# Altium PCB FCB_REV3.PcbDoc (part 1 of 2)
Units mil, origin at the board's own origin, x right, y up, seen from the top; angles counter-clockwise.
Board outline 3750 x 3250 mil, 4 copper layers (Top Layer, Layer 1, Layer 2, Bottom Layer), stack 23.756 mil thick; 113 components, 86 nets, 742 pads, 129 vias.
Unrouted connection lines stored in the file: 77.
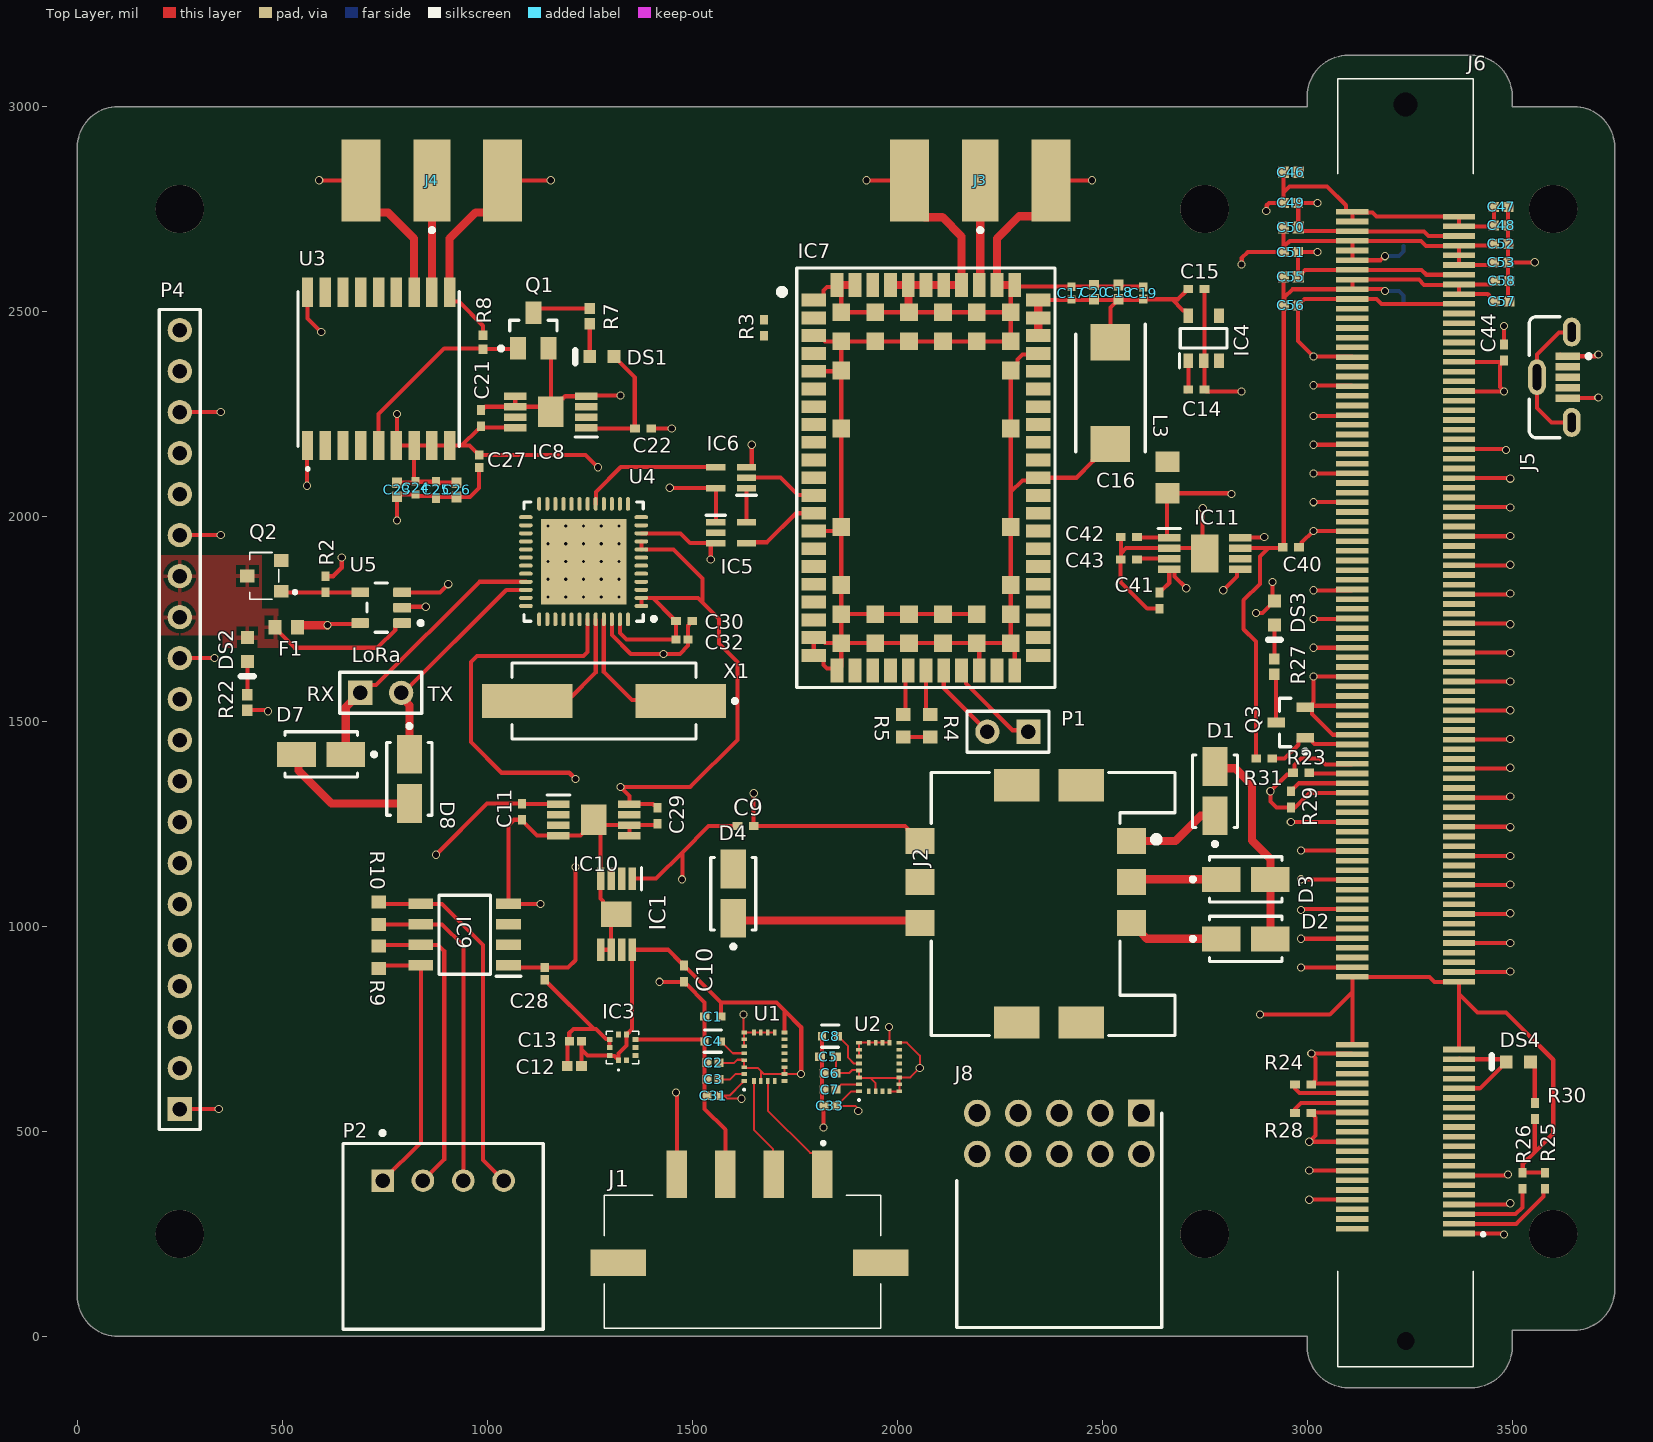
[diagram p0: Top Layer view]
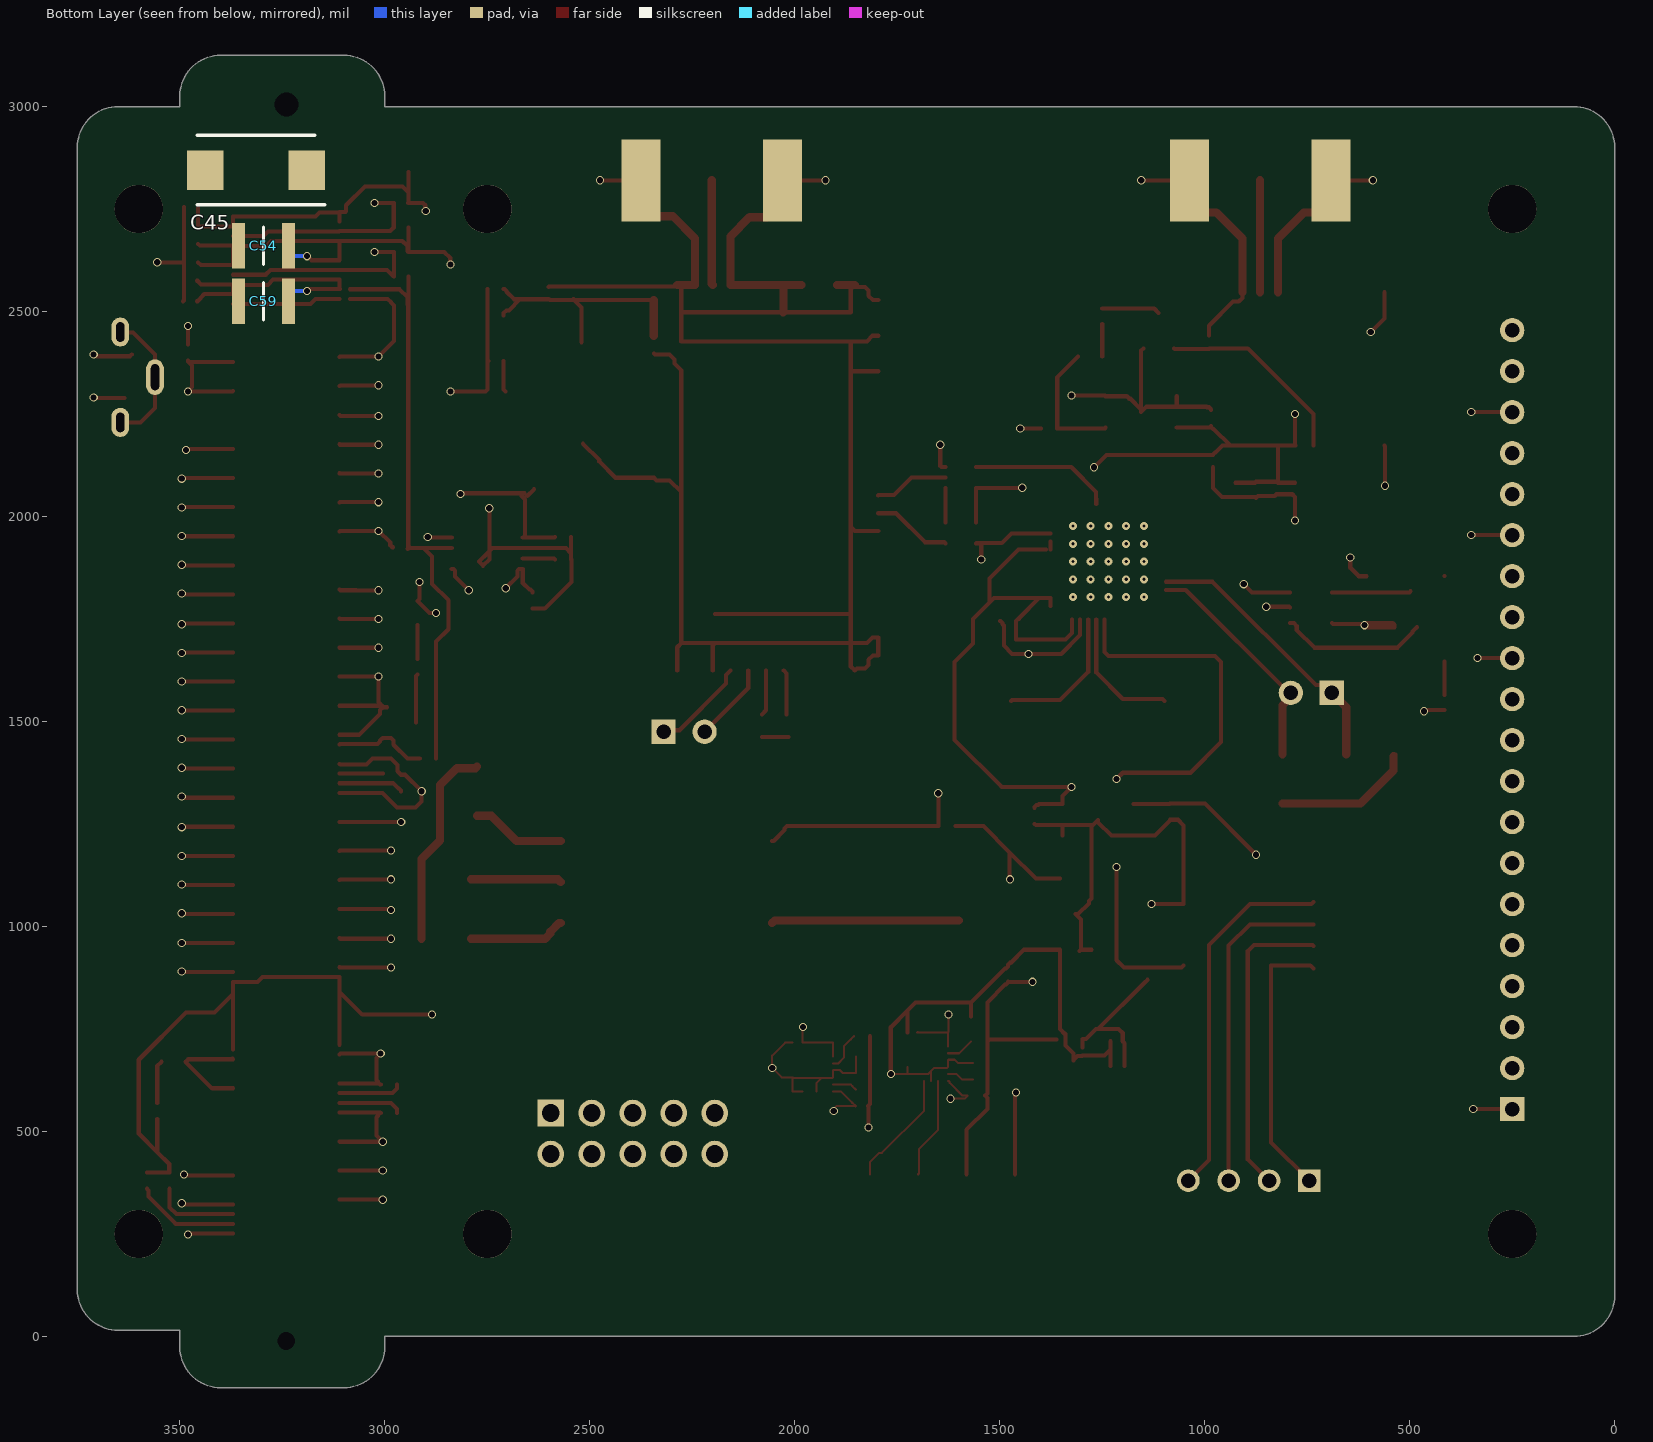
[diagram p1: Bottom Layer view, seen from below]
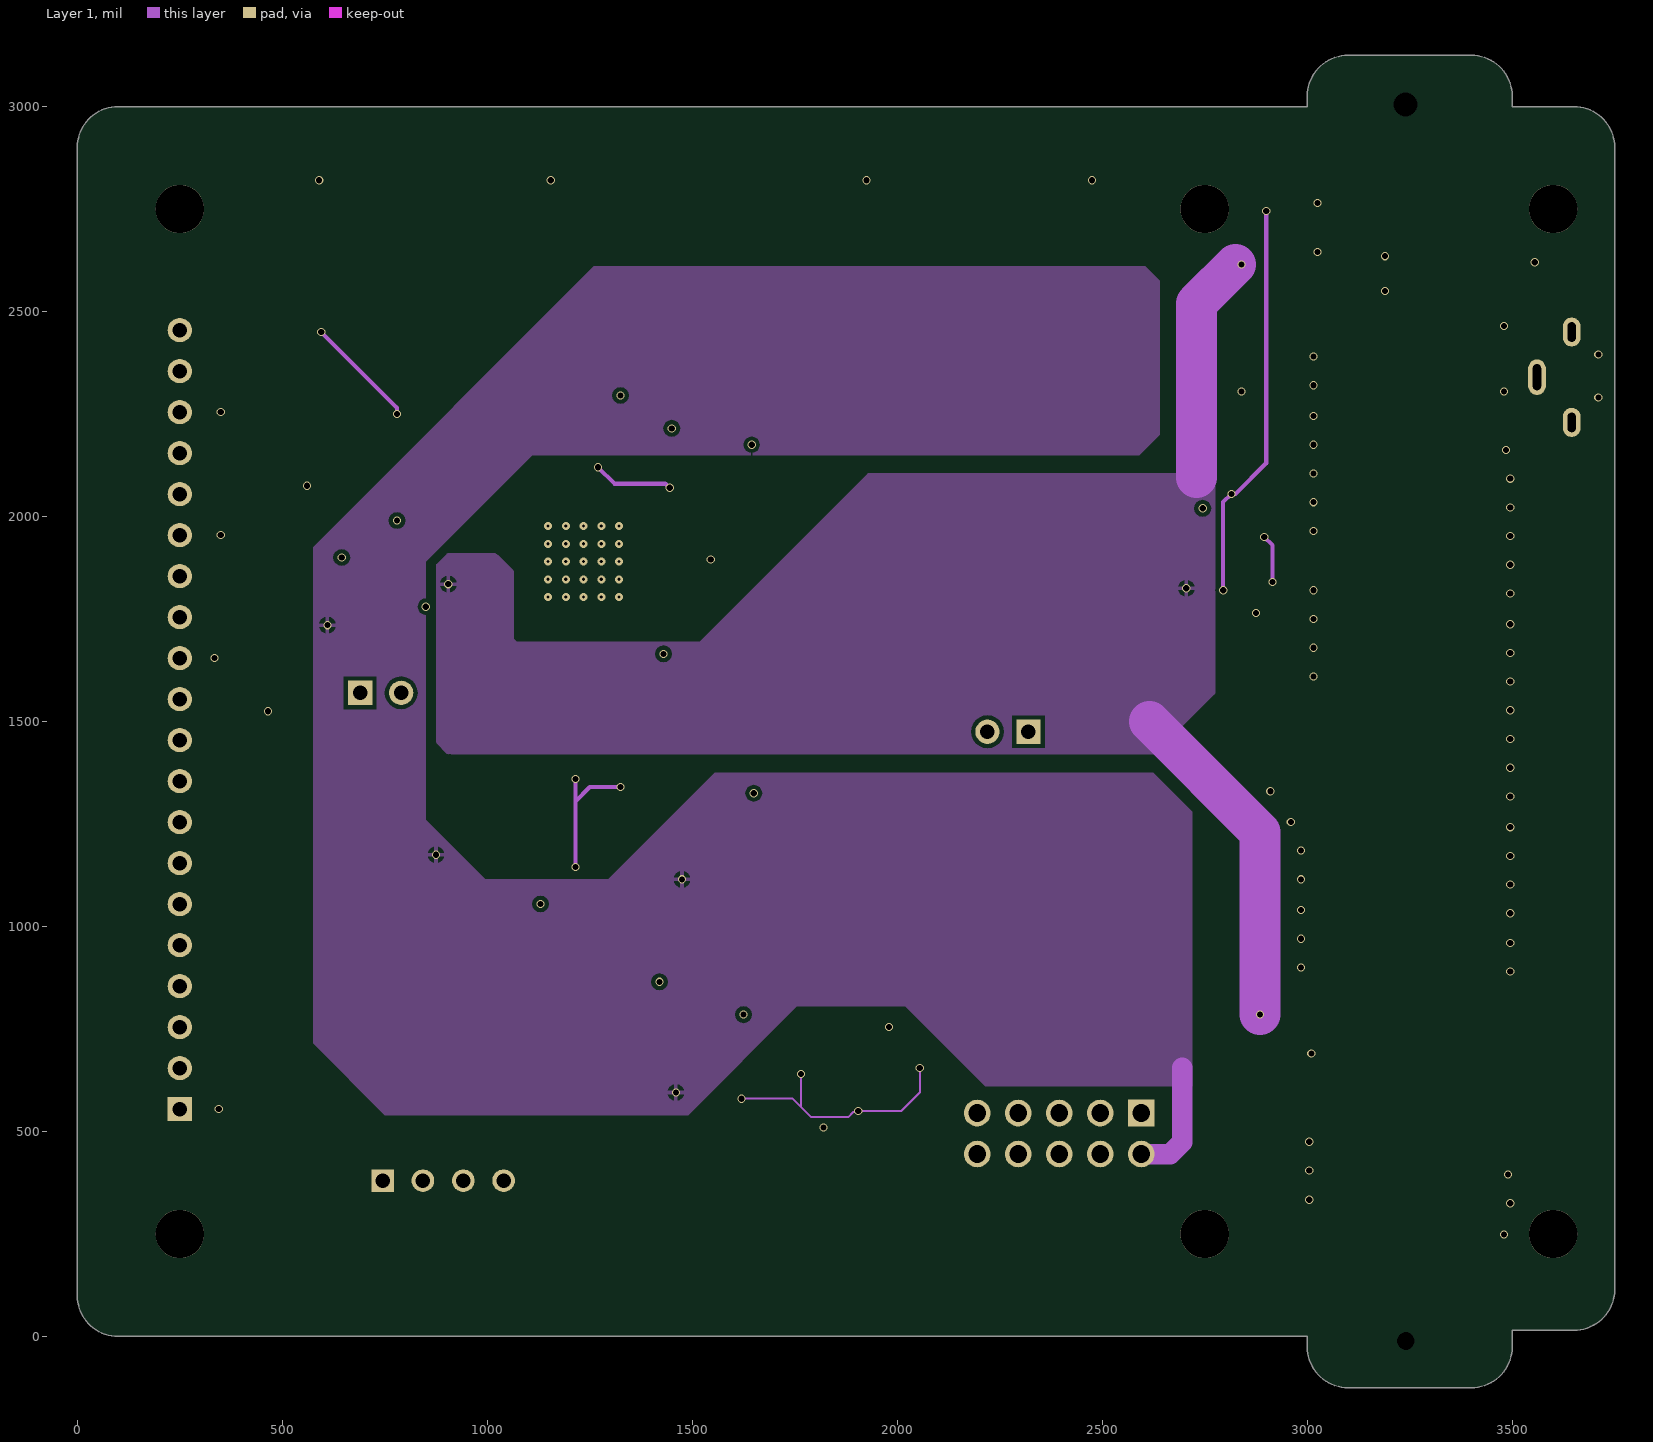
[diagram p2: Layer 1]
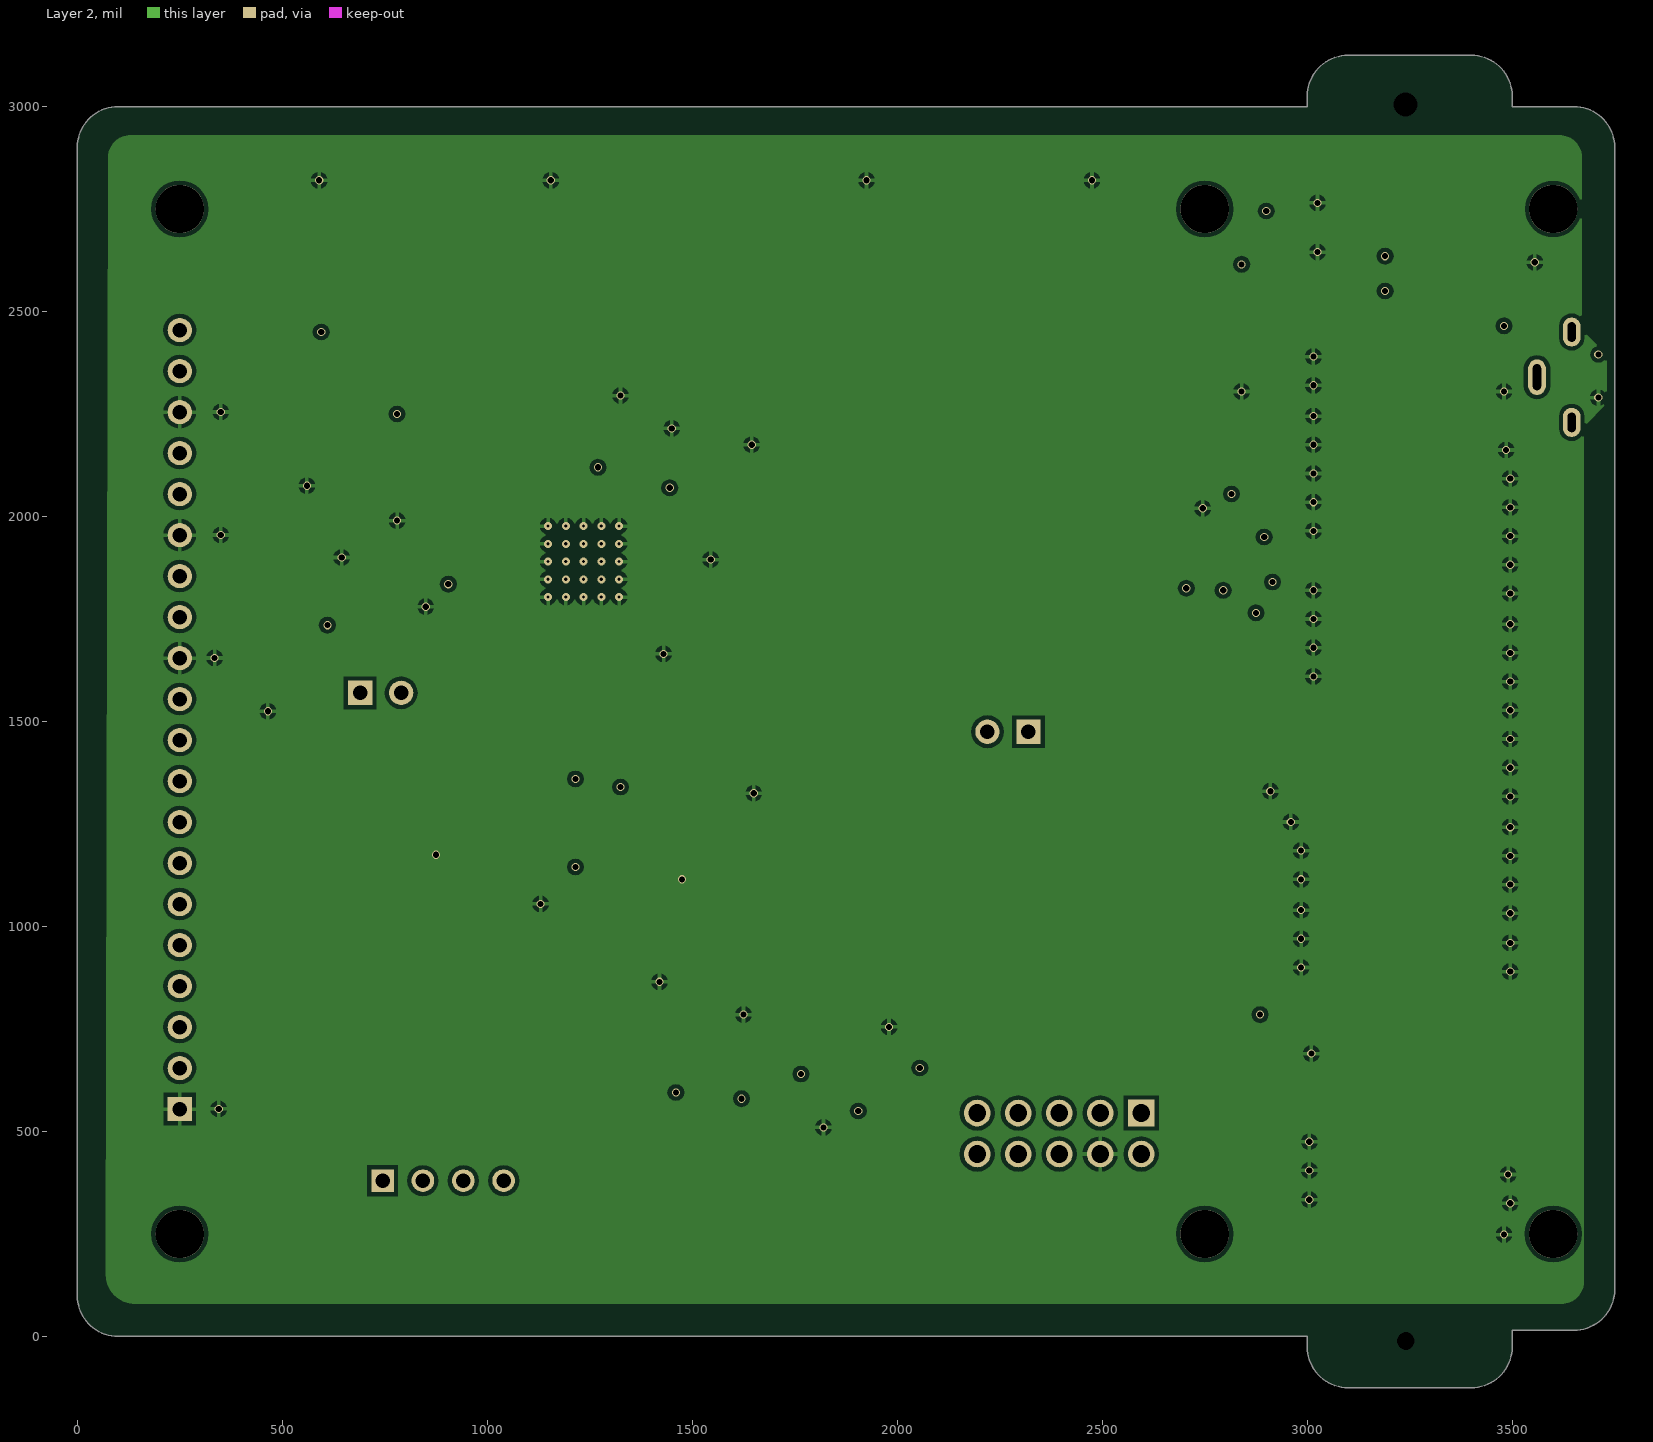
[diagram p3: Layer 2]

## Layer stack, top to bottom
Top Solder: solder mask 0.4, Solder Resist, Dk 3.5
Top Layer: signal copper 1.4
Dielectric 2: prepreg 2.8, PP-006, Dk 4.1
Layer 1: signal copper 1.378
Dielectric 1: dielectric 12.6, FR-4, Dk 4.8
Layer 2: signal copper 1.378
Dielectric 3: prepreg 2.8, PP-006, Dk 4.1
Bottom Layer: signal copper 1.4
Bottom Solder: solder mask 0.4, Solder Resist, Dk 3.5

## Board outline
3000,0 3000,-25 ccw(c3100,-25) 3100,-125 3400,-125 ccw(c3400,-25) 3500,-25 3500,15 3650,15 ccw(c3650,115) 3750,115 3750,2900 ccw(c3650,2900) 3650,3000 3500,3000 3500,3025 ccw(c3400,3025) 3400,3125 3100,3125 ccw(c3100,3025) 3000,3025 3000,3000 100,3000 ccw(c100,2900) 0,2900 0,100 ccw(c100,100) 100,0

## Design rules (kind name [scope] priority, off if disabled: settings)
Clearance [All] p1: gap=10 ignorepadtopadclearanceinfootprint=TRUE except(0: Arc-Hole Track-Hole SMDPad-Hole THPad-Hole Fill-Hole Poly-Hole Region-Hole Text-Hole; 4: Arc-Arc Arc-Track Arc-SMDPad Track-Track Track-SMDPad; 5: SMDPad-SMDPad; 8: SMDPad-Fill SMDPad-Poly SMDPad-Region; 22: Via-Hole)
HoleSize [All] p1: absolutevalues=TRUE maxlimit=100 minlimit=8 maxpercent=80.000 minpercent=20.000
PolygonConnect [All] p1: connectstyle=Relief reliefconductorwidth=10 reliefentries=4 polygonreliefangle="90 Angle" airgapwidth=10
RoutingVias [All] p1: holewidth=15 width=20 viastyle="Through Hole" minholewidth=15 minwidth=20 maxholewidth=28 maxwidth=50
SolderMaskExpansion [All] p1: expansion=4 istentingtop=FALSE
Width [All] p1: maxlimit=100 minlimit=5 preferedwidth=10
29 further rules are at their usual default settings.

## Classes and differential pairs
component class PT_Connections: C9 C10 IC1 J1
component class U_Power: C40 C41 C42 C43 C44 C45 C46 C47 C48 C49 C50 C51 C52 C53 C54 C55 C56 C57 C58 C59 DS2 F1 IC11 J5 L3 Q2 R2 R22 U5
component class U_MAX14830ETM+: C11 C29 C30 C32 D7 D8 IC10 LoRa U4 X1
component class U_MAX3488AEGSA+: C28 IC9 P2 R9 R10
component class U_GPS_MAX-M8C-0-10: C21 C22 C23 C24 C25 C26 C27 DS1 IC8 J4 Q1 R7 R8 U3
component class U_Cell_SARA-G350-02S: C14 C15 C16 C17 C18 C19 C20 D1 D2 D3 D4 IC4 IC5 IC6 IC7 J2 J3 P1 R3 R4 R5
component class U_Barometer: C12 C13 IC3
component class U_Accelerometers: C1 C2 C3 C4 C5 C6 C7 C8 C31 C33 U1 U2
component class Top: DS3 DS4 J6 J8 P4 Q3 R23 R24 R25 R26 R27 R28 R29 R30 R31

## Components (designator, comment, footprint, x,y, rotation, side; value= is the part's Value field where it differs from the comment)
C1 "CL05A106MP8NUB8" 0402 1550,780 r0 top value=10uF
C2 "C0402C104Z4VAC7867" CAPC1005X60X30LL05T10 1550.75,667.32 r0 top
C3 "C0402C104Z4VAC7867" CAPC1005X60X30LL05T10 1550.83,627.32 r0 top
C4 "AC0402KRX7R8BB103" FP-AC0402-0_5-MFG 1550,720 r180 top value="10 nF"
C5 "CL05A106MP8NUB8" 0402 1831.14,682.32 r0 top value=10uF
C6 "C0402C104Z4VAC7867" CAPC1005X60X30LL05T10 1835.87,642.32 r0 top
C7 "C0402C104Z4VAC7867" CAPC1005X60X30LL05T10 1835.83,602.32 r0 top
C8 "AC0402KRX7R8BB103" FP-AC0402-0_5-MFG 1836.14,732.32 r180 top value="10 nF"
C9 "CL05A106MP8NUB8" 0402 1630,1245 r180 top value=10uF
C10 "CL05A106MP8NUB8" 0402 1480,885 r90 top value=10uF
C11 "CL05A106MP8NUB8" 0402 1085,1280 r90 top value=10uF
C12 "GRM022R60J103KE19L" CAPC1005X55X25NL05T10 1212.68,660 r0 top
C13 "C0402C104Z4VAC7867" CAPC1005X60X30LL05T10 1215,720 r0 top
C14 "298D105X0010K2T" 0402 2729.69,2310 r180 top value=1uF
C15 "298D105X0010K2T" 0402 2729.69,2555 r180 top value=1uF
C16 "6TPC330MA" CAPPM7343X200N 2520,2300.98 r270 top
C17 "C0402C150J4GACTU" CAPC0402(1005)60_L 2425,2545 r270 top value=15pF
C18 "GRM022R60J103KE19L" CAPC1005X55X25NL05T10 2540,2547.32 r270 top
C19 "C0402C104Z4VAC7867" CAPC1005X60X30LL05T10 2600,2544.96 r270 top
C20 "C0402C560K5RACTU" CAPC1005X55N 2480,2547.32 r270 top
C21 "CL05A106MP8NUB8" 0402 985,2240 r270 top value=10uF
C22 "CL05A106MP8NUB8" 0402 1380,2215 r180 top value=10uF
C23 "C0402C560K5RACTU" CAPC1005X55N 780,2065 r270 top value=56pF
C24 "C0402C150J4GACTU" CAPC0402(1005)60_L 825,2070 r270 top value=15pF
C25 "CL05A106MP8NUB8" 0402 875,2065 r90 top value=10uF
C26 "GRM022R60J103KE19L" CAPC1005X55X25NL05T10 925,2065 r90 top value=10nF
C27 "C0402C104Z4VACTU" CAPC1005X55X30LL05T10 980,2135 r90 top value=100nF
C28 "C0402C104Z4VAC7867" CAPC1005X60X30LL05T10 1140,885.04 r90 top
C29 "CL05A106MP8NUB8" 0402 1415,1270 r90 top value=10uF
C30 "CL05A106MP8NUB8" 0402 1480,1745 r180 top value=10uF
C31 "C0402C104Z4VACTU" CAPC1005X55X30LL05T10 1550.79,587.32 r0 top
C32 "C0402C104Z4VAC7867" CAPC1005X60X30LL05T10 1475,1700 r180 top
C33 "C0402C104Z4VACTU" CAPC1005X55X30LL05T10 1835.83,562.32 r0 top
C40 "C1005X5R0J225M050BC" 0402 2960,1925 r180 top value=2.2uF
C41 "C1005X5R0J225M050BC" 0402 2640,1795 r90 top value=2.2uF
C42 "C1005X5R0J225M050BC" 0402 2565,1950 r0 top value=2.2uF
C43 "VJ0402Y104KXXCW1BC" 0402 2565,1895 r0 top value=100nF
C44 "CL05A106MP8NUB8" 0402 3480,2400 r90 top value=10uF
C45 "6TPC330MA" CAPPM7343X200N 3314.02,2845 r0 bottom value=330uF
C46 "C0402C150J4GACTU" CAPC1005X90N 2960,2840 r180 top value=15pF
C47 "C0402C560K5RACTU" CAPC1005X55N 3472.68,2755 r0 top value=56pF
C48 "C0402C103K8RACTU" CAPC1005X55N 3472.68,2710 r0 top value=10nF
C49 "C0402C104Z4VAC7867" CAPC1005X55N 2960,2765 r0 top value=100nF
C50 "C0402C150J4GACTU" CAPC1005X90N 2960,2705 r180 top value=15pF
C51 "C0402C560K5RACTU" CAPC1005X55N 2960,2645 r0 top value=56pF
C52 "C0402C103K8RACTU" CAPC1005X55N 3472.68,2665 r0 top value=10nF
C53 "C0402C104Z4VAC7867" CAPC1005X55N 3472.68,2620 r0 top value=100nF
C54 "GRM32ER60G337ME05L" CAPC3225X280N 3296.02,2660 r0 bottom value=330uF
C55 "C0402C150J4GACTU" CAPC1005X90N 2960,2585 r180 top value=15pF
C56 "C0402C560K5RACTU" CAPC1005X55N 2960,2515 r0 top value=56pF
C57 "C0402C103K8RACTU" CAPC1005X55N 3475,2525 r0 top value=10nF
C58 "C0402C104Z4VAC7867" CAPC1005X55N 3475,2575 r0 top value=100nF
C59 "GRM32ER60G337ME05L" CAPC3225X280N 3296.02,2525 r0 bottom value=330uF
D1 "SMAJ30A-E3/61" VISH-DO-214AC-2_N 2775,1330.04 r90 top
D2 "SMAJ30A-E3/61" VISH-DO-214AC-2_N 2850,970 r0 top
D3 "SMAJ30A-E3/61" VISH-DO-214AC-2_N 2850,1115 r0 top
D4 "SMAJ30A-E3/61" VISH-DO-214AC-2_N 1600,1080 r90 top
D7 "SMAJ30A-E3/61" VISH-DO-214AC-2_N 594.96,1420 r180 top
D8 "SMAJ30A-E3/61" VISH-DO-214AC-2_N 810,1359.96 r270 top
DS1 "HSMW-C191" AVAG-HSMW-C191_V 1279.53,2390 r180 top
DS2 "HSMW-C191" AVAG-HSMW-C191_V 415,1675.47 r270 top
DS3 "HSMY-C190" AVAG-HSMX-C190_V 2920,1764.53 r270 top
DS4 "HSMY-C190" AVAG-HSMX-C190_V 3515,670 r180 top
F1 "F0603E3R00FSTR" 1608[0603] 510,1730 r0 top
IC1 "TPS7B8233QDGNRQ1" SOP65P490X110-9N 1315,1030 r270 top
IC3 "LPS22HDTR" LPS22HDTR 1330,705 r90 top
IC4 "XC6227C501MR-G" SOT95P280X130-5N 2747.4,2434.88 r90 top
IC5 "FXLP34P5X" SOT65P210X110-5N 1595,1960 r0 top
IC6 "FXLP34P5X" SOT65P210X110-5N 1595,2095 r180 top
IC7 "SARA-G350-02S" SARA-G350_1 1755.12,1582.72 r0 top
IC8 "TPS7B8233QDGNRQ1" SOP65P490X110-9N 1155,2255 r180 top
IC9 "MAX3488AEGSA+" SOIC127P600X175-8N 945,980 r180 top
IC10 "TPS7B8233QDGNRQ1" SOP65P490X110-9N 1260,1260 r0 top
IC11 "MIC5357-SGYMME" SOP65P490X104-9N 2750,1910 r0 top
J1 "2-1445057-4" 214450574 1639.72,236.69 r0 top
J2 "693010010601" 693010010601 2380,1055 r270 top
J3 "142-0701-801" CINC-142-0701-801_V 2202.5,2820 r90 top
J4 "142-0701-801" CINC-142-0701-801_V 865,2820 r90 top
J5 "105133-0001" MOLX-105133-0001_V 3602.68,2339.76 r270 top
J6 "2040910-1" 20409101 3240,1497.13 r90 top
J8 "SBH11-PBPC-D05-RA-BK" SHDRRA10W64P254_2X5_1270X910X880P 2595,545 r180 top
L3 "MI0805K400R-10" LIRD-MI0805K400R-10_V 2659.14,2095 r270 top
LoRa "Header 2" HDR1X2 690,1570 r0 top
P1 "Header 2" HDR1X2 2320,1475 r180 top
P2 "S4B-XH-A(LF)(SN)" JST-S4B-XH-A(LF)(SN)_V 892.36,380 r0 top
P4 "Header 20" HDR1X20 250,554.58 r90 top locked
Q1 "FDV301N" FAIR-SOT23-3_V 1112.4,2453.31 r0 top
Q2 "SSM3J338R,LF" SSM3J332RLFT 456.34,1855 r90 top
Q3 "2N7002P,215" NXP-SOT23_L 2959.57,1497.4 r180 top
R2 "0402WGF1001TCE" 0402 605,1834.68 r90 top value=1K
R3 "CRGP0402F100K" 0402 1675,2460.32 r270 top value=100k
R4 "ESR03EZPJ332" 1608[0603] 2080,1490 r270 top value=3.3K
R5 "ESR03EZPJ332" 1608[0603] 2015,1490 r270 top value=3.3K
R7 "RC0402FR-07100RL" RESC1005X40X25ML05T10 1250,2488.7 r270 top
R8 "RC0402FR-07100KL" RESC1005X40X25NL05T10 990,2425 r90 top
R9 "ESR03EZPJ121" 1608[0603] 735,925 r90 top value=120
R10 "ESR03EZPJ121" 1608[0603] 735,1032.56 r270 top value=120
R22 "RC0402FR-07100RL" RESC1005X40X25ML05T10 415,1546.3 r90 top
R23 "CRGP0402F100K" 0402 2985,1375 r180 top value=100k
R24 "CRGP0402F100K" 0402 2990,615 r0 top value=100k
R25 "0402WGF1801TCE" 0402 3580,380 r270 top value=1.8K
R26 "0402WGF1801TCE" 0402 3525,380 r270 top value=1.8K
R27 "RC0402FR-07100RL" RESC1005X40X25ML05T10 2920,1633.7 r90 top
R28 "CRGP0402F100K" 0402 2990,545 r0 top value=100k
R29 "CRGP0402F100K" 0402 2960,1310 r270 top value=100k
R30 "0402WGF1001TCE" 0402 3555,550 r90 top value=1K
R31 "CRGP0402F100K" 0402 2895,1410 r180 top value=100k
U1 "LSM9DS1TR" STM-LGA-24_3500X3000X1000 1675.79,682.32 r90 top
U2 "LSM9DS1TR" STM-LGA-24_3500X3000X1000 1955.79,657.32 r90 top
U3 "MAX-M8C-0-10" MAX-M8 735,2360 r270 top
U4 "MAX14830ETM+" T4877+3_M 1235,1890 r180 top
U5 "LMV321IDBVR" FP-DBV0005A-MFG 741.18,1777.6 r180 top
X1 "LFXTAL003260" ABRA-ABLS2-2_V 1285,1550 r180 top

## Footprints (in the part's own frame and the unit in brackets; to place one, negate y for a bottom-side part, rotate by r counter-clockwise, add the part's x,y. Pads: shape width x height; smd on the part's side, far side on the other; paste and mask are expansions set on the pad)
0402 [mm] "Chip Capacitor, Body 1.0x0.5mm, IPC High Density"
  rect 0.6x0.5 smd: 1(-0.5,0) 2(0.5,0)
  body extent -0.55,-0.3 0.55,0.3, height 1.3
1608[0603] [mm] "Chip Capacitor, Body 1.6x0.8mm, IPC High Density"
  rect 0.8x0.9 smd: 1(-0.7,0) 2(0.7,0)
  body extent -0.87,-0.48 0.87,0.48, height 1.3
20409101 [mm]
  rect 0.35x2 smd: 1(-31.65,-3.3) 2(-31.35,3.3) 3(-31.05,-3.3) 4(-30.75,3.3) 5(-30.45,-3.3) 6(-30.15,3.3) 7(-29.85,-3.3) 8(-29.55,3.3) 9(-29.25,-3.3) 10(-28.95,3.3) 11(-28.65,-3.3) 12(-28.35,3.3) 13(-28.05,-3.3) 14(-27.75,3.3) 15(-27.45,-3.3) 16(-27.15,3.3) 17(-26.85,-3.3) 18(-26.55,3.3) 19(-26.25,-3.3) 20(-25.95,3.3) 21(-25.65,-3.3) 22(-25.35,3.3) 23(-25.05,-3.3) 24(-24.75,3.3) 25(-24.45,-3.3) 26(-24.15,3.3) 27(-23.85,-3.3) 28(-23.55,3.3) 29(-23.25,-3.3) 30(-22.95,3.3) 31(-22.65,-3.3) 32(-22.35,3.3) 33(-22.05,-3.3) 34(-21.75,3.3) 35(-21.45,-3.3) 36(-21.15,3.3) 37(-20.85,-3.3) 38(-20.55,3.3) 39(-20.25,-3.3) 40(-19.95,3.3) 41(-16.05,-3.3) 42(-15.75,3.3) 43(-15.45,-3.3) 44(-15.15,3.3) 45(-14.85,-3.3) 46(-14.55,3.3) 47(-14.25,-3.3) 48(-13.95,3.3) 49(-13.65,-3.3) 50(-13.35,3.3) 51(-13.05,-3.3) 52(-12.75,3.3) 53(-12.45,-3.3) 54(-12.15,3.3) 55(-11.85,-3.3) 56(-11.55,3.3) 57(-11.25,-3.3) 58(-10.95,3.3) 59(-10.65,-3.3) 60(-10.35,3.3) 61(-10.05,-3.3) 62(-9.75,3.3) 63(-9.45,-3.3) 64(-9.15,3.3) 65(-8.85,-3.3) 66(-8.55,3.3) 67(-8.25,-3.3) 68(-7.95,3.3) 69(-7.65,-3.3) 70(-7.35,3.3) 71(-7.05,-3.3) 72(-6.75,3.3) 73(-6.45,-3.3) 74(-6.15,3.3) 75(-5.85,-3.3) 76(-5.55,3.3) 77(-5.25,-3.3) 78(-4.95,3.3) 79(-4.65,-3.3) 80(-4.35,3.3) 81(-4.05,-3.3) 82(-3.75,3.3) 83(-3.45,-3.3) 84(-3.15,3.3) 85(-2.85,-3.3) 86(-2.55,3.3) 87(-2.25,-3.3) 88(-1.95,3.3) 89(-1.65,-3.3) 90(-1.35,3.3) 91(-1.05,-3.3) 92(-0.75,3.3) 93(-0.45,-3.3) 94(-0.15,3.3) 95(0.15,-3.3) 96(0.45,3.3) 97(0.75,-3.3) 98(1.05,3.3) 99(1.35,-3.3) 100(1.65,3.3) 101(1.95,-3.3) 102(2.25,3.3) 103(2.55,-3.3) 104(2.85,3.3) 105(3.15,-3.3) 106(3.45,3.3) 107(3.75,-3.3) 108(4.05,3.3) 109(4.35,-3.3) 110(4.65,3.3) 111(4.95,-3.3) 112(5.25,3.3) 113(5.55,-3.3) 114(5.85,3.3) 115(6.15,-3.3) 116(6.45,3.3) 117(6.75,-3.3) 118(7.05,3.3) 119(7.35,-3.3) 120(7.65,3.3) 121(7.95,-3.3) 122(8.25,3.3) 123(8.55,-3.3) 124(8.85,3.3) 125(9.15,-3.3) 126(9.45,3.3) 127(9.75,-3.3) 128(10.05,3.3) 129(10.35,-3.3) 130(10.65,3.3) 131(10.95,-3.3) 132(11.25,3.3) 133(11.55,-3.3) 134(11.85,3.3) 135(12.15,-3.3) 136(12.45,3.3) 137(12.75,-3.3) 138(13.05,3.3) 139(13.35,-3.3) 140(13.65,3.3) 141(13.95,-3.3) 142(14.25,3.3) 143(14.55,-3.3) 144(14.85,3.3) 145(15.45,3.3) 146(15.15,-3.3) 147(16.05,3.3) 148(15.75,-3.3) 149(16.65,3.3) 150(16.35,-3.3) 151(17.25,3.3) 152(16.95,-3.3) 153(17.85,3.3) 154(17.55,-3.3) 155(18.45,3.3) 156(18.15,-3.3) 157(19.05,3.3) 158(18.75,-3.3) 159(19.65,3.3) 160(19.35,-3.3) 161(20.25,3.3) 162(19.95,-3.3) 163(20.85,3.3) 164(20.55,-3.3) 165(21.45,3.3) 166(21.15,-3.3) 167(22.05,3.3) 168(21.75,-3.3) 169(22.65,3.3) 170(22.35,-3.3) 171(23.25,3.3) 172(22.95,-3.3) 173(23.85,3.3) 174(23.55,-3.3) 175(24.45,3.3) 176(24.15,-3.3) 177(25.05,3.3) 178(24.75,-3.3) 179(25.65,3.3) 180(25.35,-3.3) 181(26.25,3.3) 182(25.95,-3.3) 183(26.85,3.3) 184(26.55,-3.3) 185(27.45,3.3) 186(27.15,-3.3) 187(28.05,3.3) 188(27.75,-3.3) 189(28.65,3.3) 190(28.35,-3.3) 191(29.25,3.3) 192(28.95,-3.3) 193(29.85,3.3) 194(29.55,-3.3) 195(30.45,3.3) 196(30.15,-3.3) 197(31.05,3.3) 198(30.75,-3.3) 199(31.65,3.3) 200(31.35,-3.3)
  round 0.55 hole 1.1 unplated: MH1(-38.3,0)
  round 0.75 hole 1.5 unplated: MH2(38.3,0)
  silkscreen extent -39.9,-4.9 39.9,4.2, body extent -39.93,-4.26 39.86,4.14, height 14.85
214450574 [mm]
  rect 1.27x2.92 smd: 1(4.5,4.04) 2(1.5,4.04) 3(-1.5,4.04) 4(-4.5,4.04)
  rect 3.43x1.65 smd: 5(-8.135,-1.44) 6(8.135,-1.44)
  silkscreen extent -9,-5.5 8.14,6.07, body extent -9.68,-5.5 9.68,5.37, height 3.1
693010010601 [mm] "SIM Car d Connector - Header - 6 pins"
  rect 1.6x1.8 smd: 1(-3.9,4.85) 2(-1.36,4.85) 3(1.18,4.85) 4(-3.9,-8.25) 5(-1.36,-8.25) 6(1.18,-8.25)
  rect 2x2.8 smd: Shiled(-7.35,-2.25) Shiled(-7.35,1.75) Shiled(7.35,-2.25) Shiled(7.35,1.75)
  silkscreen extent -8.15,-7.55 8.15,7.55, body extent -8.15,-8.55 8.15,7.55, height 1.71
ABRA-ABLS2-2_V [mm] "SMD, 2-Leads, Body 11.4x4.7mm, Height 3.3mm"
  rect 5.6x2.1 smd: 1(-4.75,0) 2(4.75,0)
  silkscreen extent -8.22,-2.35 5.7,2.35, body extent -5.7,-2.35 5.7,2.35, height 3.3
AVAG-HSMW-C191_V [mm] "SMD, 2-Leads, Body 1.6x0.8mm"
  rect 0.8x0.8 smd: 1(-0.75,0) 2(0.75,0)
  silkscreen extent 1.65,-0.4 1.65,0.4, body extent -0.8,-0.4 0.8,0.4, height 0.7
AVAG-HSMX-C190_V [mm] "SMD, 2-Leads, Body 1.6x0.8mm, Height 0.9mm"
  rect 0.8x0.8 smd: 1(-0.75,0) 2(0.75,0)
  silkscreen extent 1.65,-0.4 1.65,0.4, body extent -0.8,-0.4 0.8,0.4, height 0.9
CAPC0402(1005)60_L [mm] "Chip Capacitor, Body 1.0x0.5mm, Height 0.6mm, IPC High Density"
  rect 0.52x0.52 smd: 1(-0.4,0) 2(0.4,0)
  body extent -0.55,-0.3 0.55,0.3, height 0.6
CAPC1005X55N [mm]
  rect 0.65x0.62 smd: 1(-0.44,0) 2(0.44,0)
  body extent -0.5,-0.25 0.5,0.25, height 0.55
CAPC1005X55X25NL05T10 [mm] "Chip Capacitor, 2-Leads, Body 1.00x0.50mm, IPC Medium Density"
  rect 0.66x0.62 smd: 1(-0.44,0) 2(0.44,0)
  body extent -0.53,-0.28 0.53,0.27, height 0.55
CAPC1005X55X30LL05T10 [mm] "Chip Capacitor, 2-Leads, Body 1.00x0.50mm, IPC High Density"
  rect 0.56x0.52 smd: 1(-0.38,0) 2(0.38,0)
  body extent -0.53,-0.28 0.53,0.28, height 0.55
CAPC1005X60X30LL05T10 [mm] "Chip Capacitor, 2-Leads, Body 1.00x0.50mm, IPC High Density"
  rect 0.56x0.52 smd: 1(-0.38,0) 2(0.38,0)
  body extent -0.53,-0.28 0.53,0.28, height 0.6
CAPC1005X90N [mm]
  rect 0.69x0.72 smd: 1(-0.46,0) 2(0.46,0)
  body extent -0.5,-0.25 0.5,0.25, height 0.9
CAPC3225X280N [mm]
  rect 0.82x2.82 smd: 1(-1.55,0) 2(1.55,0)
  silkscreen extent 0,-1.15 0,1.15, body extent -1.6,-1.25 1.6,1.25, height 2.8
CAPPM7343X200N [mm]
  rect 2.25x2.45 smd: 1(-3.15,0) 2(3.15,0)
  silkscreen extent -4.27,-2.15 3.65,2.15, body extent -3.65,-2.15 3.65,2.15, height 2
CINC-142-0701-801_V [mil] "SMA Connector, 5-Leads, Body 14.275x9.525mm"
  rect 200x90 smd: 1(0,0)
  rect 200x95 smd: 2(0,172.5) 3(0,-172.5)
  rect 200x95 smd far side: 4(0,172.5)
  rect 200x95 smd far side mask+4: 5(0,-172.5)
  silkscreen extent -127,-5 -117,5, body extent -87,-187 475,188, height 171
FAIR-SOT23-3_V [mm] "SOT23, 3-Leads, Body 2.92x1.3mm, Pitch 0.95mm"
  rect 1x1.4 smd: 1(-0.95,-1.1) 2(0.95,-1.1) 3(0,1.1)
  silkscreen extent -2.12,-1.22 1.46,0.65, body extent -1.46,-0.65 1.46,0.65, height 1.2
FP-AC0402-0_5-MFG [mm]
  rect 0.5x0.5 smd paste+0 mask+0: 1(-0.5,0) 2(0.5,0)
  silkscreen extent -0.54,-0.69 0.53,0.67, body extent -0.87,-0.48 0.87,0.48, height 0.25
FP-DBV0005A-MFG [mm]
  rrect17% 1.1x0.6 smd paste+0 mask+0: 1(-1.3,0.95) 2(-1.3,0) 3(-1.3,-0.95) 4(1.3,-0.95) 5(1.3,0.95)
  silkscreen extent -2.58,-1.53 0.87,1.53, body extent -1.95,-1.78 1.95,1.78, height 0.25
HDR1X2 [mm] "Connector; Header; 2 Position"
  rect 1.5x1.5 hole 0.9: 1(0,0)
  round 1.5 hole 0.9: 2(2.54,0)
  silkscreen extent -1.27,-1.27 3.81,1.27
HDR1X20 [mm] "Connector; Header; 20 Position"
  rect 1.5x1.5 hole 0.9: 1(0,0)
  round 1.5 hole 0.9: 2(2.54,0) 3(5.08,0) 4(7.62,0) 5(10.16,0) 6(12.7,0) 7(15.24,0) 8(17.78,0) 9(20.32,0) 10(22.86,0) 11(25.4,0) 12(27.94,0) 13(30.48,0) 14(33.02,0) 15(35.56,0) 16(38.1,0) 17(40.64,0) 18(43.18,0) 19(45.72,0) 20(48.26,0)
  silkscreen extent -1.27,-1.27 49.53,1.27
JST-S4B-XH-A(LF)(SN)_V [mm] "Header, 4-Leads, Body 12.4x11.5mm, Pitch 2.5mm"
  rect 1.4x1.4 hole 0.9: 1(-3.75,0)
  round 1.4 hole 0.9: 2(-1.25,0) 3(1.25,0) 4(3.75,0)
  silkscreen extent -6.2,-9.2 6.2,3.08, body extent -6.2,-9.2 6.2,2.3, height 6.15
LIRD-MI0805K400R-10_V [mm] "SMD, 2-Leads, Body 2x1.25mm"
  rect 1.285x1.47 smd: 1(-0.972,0) 2(0.973,0)
  body extent -1,-0.63 1,0.63, height 1.1
LPS22HDTR [mm]
  rect 0.35x0.3 smd: 1(-0.8,0.25) 2(-0.8,-0.25) 6(0.8,-0.25) 7(0.8,0.25)
  rect 0.3x0.35 smd: 3(-0.5,-0.8) 4(0,-0.8) 5(0.5,-0.8) 8(0.5,0.8) 9(0,0.8) 10(-0.5,0.8)
  silkscreen extent -1.45,-1 1,1, body extent -1,-1 1,1, height 0.9
MAX-M8 [mm]
  rect 1.8x0.7 smd: 1(4.75,-4.4) 2(4.75,-3.3) 3(4.75,-2.2) 4(4.75,-1.1) 5(4.75,0) 6(4.75,1.1) 7(4.75,2.2) 8(4.75,3.3) 9(4.75,4.4) 10(-4.75,4.4) 11(-4.75,3.3) 12(-4.75,2.2) 13(-4.75,1.1) 14(-4.75,0) 15(-4.75,-1.1) 16(-4.75,-2.2) 17(-4.75,-3.3) 18(-4.75,-4.4)
  silkscreen extent -4.8,-5 6.27,5
MOLX-105133-0001_V [mm] "Micro USB B, 5-Leads, Pitch 0.65mm"
  rect 0.45x1.5 smd: 1(-1.3,0.825) 2(-0.65,0.825) 3(0,0.825) 4(0.65,0.825) 5(1.3,0.825)
  oval 1.8x1.1 hole 0.5 slot 1.2 at 0 deg: 6(-2.8,1.075) 7(2.8,1.075)
  oval 2.2x1.1 hole 0.5 slot 1.6 at 0 deg: 8(0,-1.075)
  silkscreen extent -3.75,-1.56 3.75,2.25, body extent -4.02,-2.22 4,2.23, height 7.51
NXP-SOT23_L [mm] "SOT23, 3-Leads, Body 3x1.4mm, Pitch 0.95mm, IPC High Density"
  rect 1.1x0.6 smd: 1(-0.9,0.95) 2(-0.9,-0.95) 3(0.9,0)
  silkscreen extent -1.03,-1.5 0.7,1.92, body extent -0.7,-1.5 0.7,1.5, height 1.1
RESC1005X40X25ML05T10 [mm] "Chip Resistor, 2-Leads, Body 1.00x0.50mm, IPC Low Density"
  rect 0.7x0.65 smd: 1(-0.475,0) 2(0.475,0)
  body extent -0.53,-0.27 0.53,0.28, height 0.4
RESC1005X40X25NL05T10 [mm] "Chip Resistor, 2-Leads, Body 1.00x0.50mm, IPC Medium Density"
  rect 0.6x0.55 smd: 1(-0.425,0) 2(0.425,0)
  body extent -0.53,-0.27 0.53,0.28, height 0.4
SARA-G350_1 [mm]
  rect 1.5x0.8 smd: 1(1.05,24) 2(1.05,22.9) 3(1.05,21.8) 4(1.05,20.7) 5(1.05,19.6) 6(1.05,18.5) 7(1.05,17.4) 8(1.05,16.3) 9(1.05,15.2) 10(1.05,14.1) 11(1.05,13) 12(1.05,11.9) 13(1.05,10.8) 14(1.05,9.7) 15(1.05,8.6) 16(1.05,7.5) 17(1.05,6.4) 18(1.05,5.3) 19(1.05,4.2) 20(1.05,3.1) 21(1.05,2) 33(14.95,2) 34(14.95,3.1) 35(14.95,4.2) 36(14.95,5.3) 37(14.95,6.4) 38(14.95,7.5) 39(14.95,8.6) 40(14.95,9.7) 41(14.95,10.8) 42(14.95,11.9) 43(14.95,13) 44(14.95,14.1) 45(14.95,15.2) 46(14.95,16.3) 47(14.95,17.4) 48(14.95,18.5) 49(14.95,19.6) 50(14.95,20.7) 51(14.95,21.8) 52(14.95,22.9) 53(14.95,24)
  rect 0.8x1.5 smd: 22(2.5,1.05) 23(3.6,1.05) 24(4.7,1.05) 25(5.8,1.05) 26(6.9,1.05) 27(8,1.05) 28(9.1,1.05) 29(10.2,1.05) 30(11.3,1.05) 31(12.4,1.05) 32(13.5,1.05) 54(13.5,24.95) 55(12.4,24.95) 56(11.3,24.95) 57(10.2,24.95) 58(9.1,24.95) 59(8,24.95) 60(6.9,24.95) 61(5.8,24.95) 62(4.7,24.95) 63(3.6,24.95) 64(2.5,24.95)
  rect 1.1x1.1 smd: 65(2.75,23.25) 66(4.85,23.25) 67(6.95,23.25) 68(9.05,23.25) 69(11.15,23.25) 70(13.25,23.25) 71(2.75,21.45) 72(4.85,21.45) 73(6.95,21.45) 74(9.05,21.45) 75(11.15,21.45) 76(13.25,21.45) 77(2.75,19.65) 78(13.25,19.65) 79(2.75,16.05) 80(13.25,16.05) 81(2.75,9.95) 82(13.25,9.95) 83(2.75,6.35) 84(13.25,6.35) 85(2.75,4.55) 86(4.85,4.55) 87(6.95,4.55) 88(9.05,4.55) 89(11.15,4.55) 90(13.25,4.55) 91(2.75,2.75) 92(4.85,2.75) 93(6.95,2.75) 94(9.05,2.75) 95(11.15,2.75) 96(13.25,2.75)
  silkscreen extent -1.1,0 16,26
SHDRRA10W64P254_2X5_1270X910X880P [mm]
  rect 1.65x1.65 hole 1.1: 1(0,0)
  round 1.65 hole 1.1: 2(0,2.54) 3(2.54,0) 4(2.54,2.54) 5(5.08,0) 6(5.08,2.54) 7(7.62,0) 8(7.62,2.54) 9(10.16,0) 10(10.16,2.54)
  silkscreen extent -1.27,0 11.43,13.28, body extent -1.27,-0.32 11.43,13.28, height 8.8
SOIC127P600X175-8N [mm]
  rect 1.525x0.65 smd: 1(-2.712,1.905) 2(-2.712,0.635) 3(-2.712,-0.635) 4(-2.712,-1.905) 5(2.712,-1.905) 6(2.712,-0.635) 7(2.712,0.635) 8(2.712,1.905)
  silkscreen extent -3.47,-2.45 1.6,2.58, body extent -3,-2.45 3,2.45, height 1.75
SOP65P490X104-9N [mm]
  rect 1.4x0.45 smd: 1(-2.2,0.975) 2(-2.2,0.325) 3(-2.2,-0.325) 4(-2.2,-0.975) 5(2.2,-0.975) 6(2.2,-0.325) 7(2.2,0.325) 8(2.2,0.975)
  rect 1.73x2.36 smd: 9(0,0)
  silkscreen extent -2.9,1.55 -1.5,1.55, body extent -2.45,-1.5 2.45,1.5, height 1.04
SOP65P490X110-9N [mm]
  rect 1.4x0.45 smd: 1(-2.2,0.975) 2(-2.2,0.325) 3(-2.2,-0.325) 4(-2.2,-0.975) 5(2.2,-0.975) 6(2.2,-0.325) 7(2.2,0.325) 8(2.2,0.975)
  rect 1.57x1.89 smd: 9(0,0)
  silkscreen extent -2.9,1.55 -1.5,1.55, body extent -2.45,-1.5 2.45,1.5, height 1.1
SOT65P210X110-5N [mm]
  rect 1.2x0.4 smd: 1(-0.95,0.65) 2(-0.95,0) 3(-0.95,-0.65) 4(0.95,-0.65) 5(0.95,0.65)
  silkscreen extent -1.55,1.1 -0.35,1.1, body extent -1.05,-1 1.05,1, height 1.1
SOT95P280X130-5N [mm]
  rect 0.9x0.6 smd: 1(-1.4,0.95) 2(-1.4,0) 3(-1.4,-0.95) 4(1.4,-0.95) 5(1.4,0.95)
  silkscreen extent -1.85,-1.45 0.6,1.5, body extent -1.4,-1.45 1.4,1.45, height 1.3
SSM3J332RLFT [mm]
  rect 0.8x0.9 smd: 1(-0.95,-1.05) 2(0.95,-1.05) 3(0,1.05)
  silkscreen extent -1.45,-2 1.45,0.9
STM-LGA-24_3500X3000X1000 [mm] "LGA, 24-Leads, Body 3.65x3.15mm, Pitch 0.43mm"
  rect 0.23x0.35 smd mask+0.05: 1(-1.505,1.25) 6(-1.505,-1.25) 7(-1.075,-1.25) 8(-0.645,-1.25) 9(-0.215,-1.25) 10(0.215,-1.25) 11(0.645,-1.25) 12(1.075,-1.25) 13(1.505,-1.25) 18(1.505,1.25) 19(1.075,1.25) 20(0.645,1.25) 21(0.215,1.25) 22(-0.215,1.25) 23(-0.645,1.25) 24(-1.075,1.25)
  rect 0.35x0.23 smd mask+0.05: 2(-1.505,0.645) 3(-1.505,0.215) 4(-1.505,-0.215) 5(-1.505,-0.645) 14(1.505,-0.645) 15(1.505,-0.215) 16(1.505,0.215) 17(1.505,0.645)
  silkscreen extent -2.11,1.19 -1.98,1.31, body extent -1.82,-1.57 1.83,1.58, height 1.03
T4877+3_M [mm] "QFN, 48-Leads, Body 7x7mm, Pitch 0.5mm, Thermal Pad 5.3x5.3mm, IPC Low Density"
  oval 0.85x0.25 smd: 1(-3.575,2.75) 2(-3.575,2.25) 3(-3.575,1.75) 4(-3.575,1.25) 5(-3.575,0.75) 6(-3.575,0.25) 7(-3.575,-0.25) 8(-3.575,-0.75) 9(-3.575,-1.25) 10(-3.575,-1.75) 11(-3.575,-2.25) 12(-3.575,-2.75) 25(3.575,-2.75) 26(3.575,-2.25) 27(3.575,-1.75) 28(3.575,-1.25) 29(3.575,-0.75) 30(3.575,-0.25) 31(3.575,0.25) 32(3.575,0.75) 33(3.575,1.25) 34(3.575,1.75) 35(3.575,2.25) 36(3.575,2.75)
  oval 0.25x0.85 smd: 13(-2.75,-3.575) 14(-2.25,-3.575) 15(-1.75,-3.575) 16(-1.25,-3.575) 17(-0.75,-3.575) 18(-0.25,-3.575) 19(0.25,-3.575) 20(0.75,-3.575) 21(1.25,-3.575) 22(1.75,-3.575) 23(2.25,-3.575) 24(2.75,-3.575) 37(2.75,3.575) 38(2.25,3.575) 39(1.75,3.575) 40(1.25,3.575) 41(0.75,3.575) 42(0.25,3.575) 43(-0.25,3.575) 44(-0.75,3.575) 45(-1.25,3.575) 46(-1.75,3.575) 47(-2.25,3.575) 48(-2.75,3.575)
  rect 5.3x5.3 smd: 49(0,0)
  silkscreen extent -4.47,-3.7 3.7,3.7, body extent -3.55,-3.55 3.55,3.55, height 0.8
VISH-DO-214AC-2_N [mm] "DO-214AC, 2-Leads, Body 4.5x2.79mm, IPC Medium Density"
  rect 2.4x1.55 smd: 1(-1.525,0) 2(1.525,0)
  silkscreen extent -3.4,-1.4 2.25,1.4, body extent -2.25,-1.4 2.25,1.39, height 2.29

## Part data
C1 C5 C9 C10 C11 C14 C15 C21 C22 C25 C29 C30 C40 C41 C42 C43 C44: library part Cap, "Capacitor", LatestRevisionDate=17-Jul-2002, LatestRevisionNote="Re-released for DXP Platform.", PackageDescription="Radial Cap, Thru-Hole; 2 Leads; 0.3 in Pin Spacing", PackageReference=RAD-0.3, Published=8-Jun-2000, Publisher="Altium Limited"
C2 C3 C6 C7 C13 C19 C28 C32: library part CMP-2008-02369-1, Manufacturer=Kemet, Part Number=C0402C104Z4VAC7867, spec=100nF
C4 C8: library part CMP-03422-001250-1, "CAP CER 10000PF 25V X7R 0402", Capacitance="10 nF", Manufacturer=Yageo, Package=AC0402-0.5, Temperature="-55°C to +125°C", Temperature Characteristic=X7R, Temperature Coefficient=±15%, Temperature Range High=+125°C, Temperature Range Low=-55°C, Tolerance=0.1, Voltage Rating="25 V", Automotive=Yes, Automotive Grade="Grade 1", Category=Cap, ComponentLink2Description=Datasheet, ComponentLink2URL=http://www.yageo.com/documents/recent/UPY-AC_NP0X7R_16V-to-630V_12.pdf, Device Class L1="Passive Components", Device Class L2=Capacitors, Device Class L3="Ceramic Capacitors", Digikey Description="CAP CER 10000PF 25V X7R 0402", Footprint Url=http://www.yageo.com/exep/pages/download/literatures/UPY-C_GEN_24.pdf, Height=0.55mm, Ipc Land Pattern Name=CAPC10050X50, Lead Free=Yes, Manufacturer Part Number=AC0402KRX7R8BB103, Material=Ceramic, Octopart=https://octopart.com/ac0402krx7r8bb103-yageo-75666114, RoHS=TRUE
C12 C18 C26: library part CMP-2008-04044-1, Manufacturer=Murata, Part Number=GRM022R60J103KE19L
  C12 C18: spec=10nF
C16: "Capacitor Polarised", Manufacturer_Name=Panasonic, Mouser Part Number=667-6TPC330MA, RS Part Number=7887368P, Datasheet Link=https://industrial.panasonic.com/cdbs/www-data/pdf/AAA8000/AAA8000C68.pdf, Height=2mm, Manufacturer_Part_Number=6TPC330MA, Mouser Price/Stock=https://www.mouser.com/Search/Refine.aspx?Keyword=667-6TPC330MA, RS Price/Stock=http://au.rs-online.com/web/p/products/7887368P, spec=330uF
C17 C24: library part CMP-1034-00802-1, "CAP 15pF 16V ±5% 0402 (1005 Metric) Thickness 0.6mm SMD", Case-EIA=0402, Case-Metric=1005, Rated Voltage="16 V", Tolerance=Â±5%, Max Thickness="0.6 mm", Technology=SMT
C20 C23 C47 C51 C56: "Capacitor", Manufacturer_Name=Kemet, Mouser Part Number=80-C0402C560K5RACTU, Datasheet Link=https://content.kemet.com/datasheets/KEM_C1002_X7R_SMD.pdf, Height=0.55mm, Manufacturer_Part_Number=C0402C560K5RACTU
  C20: Mouser Price/Stock=https://www.mouser.com/Search/Refine.aspx?Keyword=80-C0402C560K5RACTU, spec=56pF
  C23 C47 C51 C56: Arrow Part Number=C0402C560K5RACTU, Mouser Price/Stock=https://www.mouser.co.uk/ProductDetail/KEMET/C0402C560K5RACTU?qs=gt1LBUVyoHmQZW5v3ySgNQ%3D%3D
C27 C31 C33: library part CMP-2008-03088-1, Manufacturer=Kemet, Part Number=C0402C104Z4VACTU
C45: "Capacitor Polarised", Manufacturer_Name=Panasonic, Mouser Part Number=667-6TPC330MA, Arrow Part Number=6TPC330MA, Arrow Price/Stock=https://www.arrow.com/en/products/6tpc330ma/panasonic, Datasheet Link=https://industrial.panasonic.com/cdbs/www-data/pdf/AAA8000/AAA8000C68.pdf, Height=2mm, Manufacturer_Part_Number=6TPC330MA, Mouser Price/Stock=https://www.mouser.co.uk/ProductDetail/Panasonic/6TPC330MA?qs=OE1iw1LrrPEq6z1np%252BZymw%3D%3D
C46 C50 C55: "Capacitor", Manufacturer_Name=Kemet, Mouser Part Number=80-C0402C150J4G, Arrow Part Number=C0402C150J4GACTU, Arrow Price/Stock=https://www.arrow.com/en/products/c0402c150j4gactu/kemet-corporation, Datasheet Link=https://content.kemet.com/datasheets/KEM_C1002_X7R_SMD.pdf, Height=0.55mm, Manufacturer_Part_Number=C0402C150J4GACTU, Mouser Price/Stock=https://www.mouser.com/Search/Refine.aspx?Keyword=80-C0402C150J4G
C48 C52 C57: "Capacitor", Manufacturer_Name=Kemet, Mouser Part Number=80-C0402C103K8R, Arrow Part Number=C0402C103K8RACTU, Arrow Price/Stock=https://www.arrow.com/en/products/c0402c103k8ractu/kemet-corporation, Datasheet Link=https://content.kemet.com/datasheets/KEM_C1002_X7R_SMD.pdf, Height=0.55mm, Manufacturer_Part_Number=C0402C103K8RACTU, Mouser Price/Stock=https://www.mouser.co.uk/ProductDetail/KEMET/C0402C103K8RACTU?qs=JAINH4q0Y0HkMNTUebnT7w%3D%3D
C49 C53 C58: library part C0402C560K5RACTU, "Capacitor", Manufacturer_Name=Kemet, Mouser Part Number=80-C0402C560K5RACTU, Arrow Part Number=C0402C560K5RACTU, Datasheet Link=https://content.kemet.com/datasheets/KEM_C1002_X7R_SMD.pdf, Height=0.55mm, Manufacturer_Part_Number=C0402C560K5RACTU, Mouser Price/Stock=https://www.mouser.co.uk/ProductDetail/KEMET/C0402C560K5RACTU?qs=gt1LBUVyoHmQZW5v3ySgNQ%3D%3D
C54 C59: "Capacitor", Manufacturer_Name="Murata Electronics", Mouser Part Number=81-GRM32ER60G337ME5L, Arrow Part Number=GRM32ER60G337ME05L, Arrow Price/Stock=https://www.arrow.com/en/products/grm32er60g337me05l/murata-manufacturing, Datasheet Link=https://componentsearchengine.com/Datasheets/2/GRM32ER60G337ME05L.pdf, Height=2.8mm, Manufacturer_Part_Number=GRM32ER60G337ME05L, Mouser Price/Stock=https://www.mouser.co.uk/ProductDetail/Murata-Electronics/GRM32ER60G337ME05L?qs=MzgNgRTiRUU9wX46aOSi8Q%3D%3D
D1 D2 D3 D4 D7 D8: library part CMP-0548-00228-2, "Transient Voltage Suppressor, 6.40 to 231 V, 30 V Stand-off Voltage, Uni-Directional, -55 to 155 degC, 2-pin DO-214AC, Pb-Free, Tape and Reel", Manufacturer="Vishay Semiconductor", Operating Junction and Storage Temperature Range="-55 to 150 degC", ComponentLink1Description="Manufacturer URL", ComponentLink1URL=http://www.vishay.com/, ComponentLink2Description=Datasheet, ComponentLink2URL=http://www.vishay.com/docs/88390/smaj50a.pdf, ComponentLink3Description="Package Specification", ComponentLink3URL=http://www.vishay.com/docs/88390/smaj50a.pdf, DatasheetVersion=12/8/2013, ID (uA)=1, IFSM="40 A", Mounting Technology="Surface Mount", PackageDescription="2-Pin DO-214AC (SMA), Body 4.245 x 2.665 mm", PackageReference=DO-214AC-2, Packing="Tape and Reel", PartNumber=SMAJ30A-E3/61, PPPM (W)="400, 300", RoHS=TRUE, VBR Uni-Directional (V)="6.4 to 231", VWM (V)=30
DS1 DS2: library part CMP-1744-00001-1, "LED Uni-Color White, 78 mW, 20 mA, -40 to 85 degC, 2-Pin SMD, RoHS, Tape and Reel", Current Rating="300 mA", Max Operating Temperature="85 degC", Min Operating Temperature="-20 degC", Package Quantity=560, ComponentLink1Description="Manufacturer URL", ComponentLink1URL=http://www.avagotech.com/, ComponentLink2Description=Datasheet, ComponentLink2URL=http://docs.avagotech.com/docs/AV02-0186EN, Contact Finish=Silver, Contact Material=Copper, Contact Plating=Silver, DatasheetVersion=May-10, Height="12 mm", Length="16 mm", Mount="Through Hole", PackageDescription="2-Pin Surface Mount Device, Body 1.6 x 0.8 mm", PackageReference=HSMW-C191, Packaging=Bulk, Radiation Hardening=No, REACH SVHC=Unknown, RoHSCompliant=true, Width="12 mm"
DS3 DS4: library part CMP-1744-00003-1, "LED Uni-Color Yellow, 65 mW, 20 mA, -40 to 85 degC, 2-Pin SMD, RoHS, Tape and Reel", Case\Package=0603, Case Code (Metric)=1608, Max Operating Temperature="155 degC", Min Operating Temperature="-55 degC", Package Quantity=5000, Power Rating="100 mW", Resistance="390 Ohm", Tolerance=1%, Voltage Rating="50 V", Case Code (Imperial)=0603, ComponentLink1Description="Manufacturer URL", ComponentLink1URL=http://www.avagotech.com/, ComponentLink2Description=Datasheet, ComponentLink2URL=http://docs.avagotech.com/docs/AV02-0551EN, ComponentLink3Description="Package Specification", ComponentLink3URL=http://www.fairchildsemi.com/dwg/MA/MA03D.pdf, DatasheetVersion=Mar-12, Height="0.45 mm", Length="1.6 mm", Mount="Surface Mount", PackageDescription="2-Pin Surface Mount Device, Body 1.6 x 0.8 mm, Height 0.9 mm", PackageReference=HSMX-C190, Packaging="Tape and Reel", Pins=2, REACH SVHC="No SVHC", RoHSCompliant=true, Voltage Rating (DC)="50 V", Width="0.8 mm"
F1: library part "Fuse 2", "Fuse", LatestRevisionDate=17-Jul-2002, LatestRevisionNote="Re-released for DXP Platform.", PackageDescription="Thru-Hole; 2 Leads", PackageReference=PIN-W2/E2.8, Published=8-Jun-2000, Publisher="Altium Limited"
IC1 IC8 IC10: "Integrated Circuit", Manufacturer_Name="Texas Instruments", Mouser Part Number=595-TPS7B8233QDGNRQ1, Arrow Part Number=TPS7B8233QDGNRQ1, Arrow Price/Stock=https://www.arrow.com/en/products/tps7b8233qdgnrq1/texas-instruments, Datasheet Link=http://www.ti.com/lit/gpn/tps7b82-q1, Height=1.1mm, Manufacturer_Part_Number=TPS7B8233QDGNRQ1, Mouser Price/Stock=https://www.mouser.co.uk/ProductDetail/Texas-Instruments/TPS7B8233QDGNRQ1?qs=gTYE2QTfZfTgserf%2FHg6KA%3D%3D
IC3: "Integrated Circuit", Manufacturer_Name=STMicroelectronics, Mouser Part Number=511-LPS22HDTR, Arrow Part Number=LPS22HDTR, Arrow Price/Stock=https://www.arrow.com/en/products/lps22hdtr/stmicroelectronics, Datasheet Link=https://www.st.com/resource/en/datasheet/lps22hd.pdf, Height=0.8mm, Manufacturer_Part_Number=LPS22HDTR, Mouser Price/Stock=https://www.mouser.co.uk/ProductDetail/STMicroelectronics/LPS22HDTR?qs=qVqInAHJvrZgdoVrJXJCrw%3D%3D
IC4: "Integrated Circuit", Manufacturer_Name=Torex, Mouser Part Number=865-XC6227C501MR-G, Arrow Part Number=XC6227C501MR-G, Datasheet Link=https://www.torexsemi.com/file/xc6227/XC6227.pdf, Height=1.3mm, Manufacturer_Part_Number=XC6227C501MR-G, Mouser Price/Stock=https://www.mouser.co.uk/ProductDetail/Torex-Semiconductor/XC6227C501MR-G?qs=AsjdqWjXhJ85%252BgmQqME4lA%3D%3D
IC5 IC6: "Integrated Circuit", Manufacturer_Name="ON Semiconductor", Mouser Part Number=512-FXLP34P5X, Arrow Part Number=FXLP34P5X, Arrow Price/Stock=https://www.arrow.com/en/products/fxlp34p5x/on-semiconductor, Datasheet Link=https://www.onsemi.com/pub/Collateral/FXLP34-D.pdf, Height=1.1mm, Manufacturer_Part_Number=FXLP34P5X, Mouser Price/Stock=https://www.mouser.com/Search/Refine.aspx?Keyword=512-FXLP34P5X
IC7: "Integrated Circuit", Manufacturer_Name=U-Blox, Datasheet Link=https://www.u-blox.com/sites/default/files/SARA-G3_DataSheet_%28UBX-13000993%29.pdf, Manufacturer_Part_Number=SARA-G350-02S
IC9: "Integrated Circuit", Manufacturer_Name="Maxim Integrated", Mouser Part Number=700-MAX3488AEGSA+, Arrow Part Number=MAX3488AEGSA+, Datasheet Link=https://datasheets.maximintegrated.com/en/ds/MAX3483AE-MAX3491AE.pdf, Height=1.75mm, Manufacturer_Part_Number=MAX3488AEGSA+, Mouser Price/Stock=https://www.mouser.com/Search/Refine.aspx?Keyword=700-MAX3488AEGSA%2B
IC11: "Integrated Circuit", Manufacturer_Name=Microchip, Mouser Part Number=998-MIC5357-SGYMME, Arrow Part Number=MIC5357-SGYMME, Arrow Price/Stock=https://www.arrow.com/en/products/mic5357-sgymme/microchip-technology, Datasheet Link=http://ww1.microchip.com/downloads/en/DeviceDoc/mic5357.pdf, Height=1.04mm, Manufacturer_Part_Number=MIC5357-SGYMME, Mouser Price/Stock=https://www.mouser.com/Search/Refine.aspx?Keyword=998-MIC5357-SGYMME
J1: "Connector", Manufacturer_Name="TE Connectivity", Mouser Part Number=571-2-1445057-4, Arrow Part Number=2-1445057-4, Arrow Price/Stock=https://www.arrow.com/en/products/2-1445057-4/te-connectivity, Datasheet Link=http://www.te.com/commerce/DocumentDelivery/DDEController?Action=showdoc&DocId=Customer+Drawing%7F1445057%7FC3%7Fpdf%7FEnglish%7FENG_CD_1445057_C3.pdf%7F2-1445057-4, Height=3mm, Manufacturer_Part_Number=2-1445057-4, Mouser Price/Stock=https://www.mouser.co.uk/ProductDetail/TE-Connectivity-AMP/2-1445057-4?qs=MP5IOa7hLjUITJfr001xww%3D%3D
J2: library part CMP-1502-00154-1, "WR-CRD Mini SIM Card Connector Header", Manufacturer="Wurth Elektronik", Operating Temperature=-25to85degC, Rated Current=0.5A, Withstanding Voltage=500VAC, Working Voltage=50VAC, Datasheet URL=https://katalog.we-online.de/em/datasheet/693010010601.pdf, Manufacturer URL=http://www.we-online.de, Mounting Technology=SMT, Package Reference=693010010601, Packaging=TapeandReel, Part Number=693010010601, Publisher=WurthElektronik
J3 J4: library part CMP-2000-05490-1, "SMA End Launch Jack Receptacle, 50 Ohm, 0 to 18 GHz, -65 to 165 degC, 5-Pin SMD, RoHS, Bulk", Manufacturer=EmersonConnectivitySolutions, Maximum Frequency=18GHz, Operating Temperature Range=-65Cto+165C, Package Description="5-Pin Surface Mount Device, Body 14.275 x 9.525 mm", Body Material=Brass, Body Style=Straight, Brand=Johnson/EmersonConnectivitySolutions, Connector Type=JackPCB, Contact Plating=Gold, Datasheet URL=https://belfuse.com/resources/Johnson/productinformation/pi-142-0701-801.pdf, Datasheet Version=12/2014, Factory Pack Quantity=5, Gender=Jack(Female), Impedance=50Ohms, Manufacturer URL=http://www.cinch.com/, Mounting Technology=SurfaceMount, Orientation=Straight, Package Reference=142-0701-801, Package URL=https://belfuse.com/resources/Johnson/drawings/dr-1420701801.pdf, Product=Connectors, Product Category=RFConnectors/CoaxialConnectors, RF Series=SMA, RoHS=Details, Series=SMA, Termination Style=Solder
J5: library part CMP-2000-05829-1, "Micro-USB B Receptacle, Vertical, -30 to 85 degC, 5-Pin SMD, RoHS, Tape and Reel", Color=Black, Current Rating=1.8A, Flammability Rating=UL94V-0, Manufacturer=Molex, Package Description="5-Pin Surface Mount Device, Pitch 0.65 mm", Package Version="Rev. C, 11/2015", Voltage - Max=30V, Voltage Rating=30VAC, Brand=Molex, Connector Type=MicroUSBTypeBReceptacle, Contact Material=CopperAlloy, Contact Plating=Gold, Datasheet URL=http://www.molex.com/webdocs/datasheets/pdf/en-us/1051330001_IO_CONNECTORS.pdf, Datasheet Version=03/2016, Factory Pack Quantity=6000, Gender=Receptacle, Manufacturer URL=http://www.molex.com/, Mounting Angle=Vertical, Mounting Style=SMD/SMT, Mounting Technology=SurfaceMount, Number of Ports=1, Package Reference=105133-0001, Package URL=http://www.molex.com/pdm_docs/sd/1051330001_sd.pdf, Packaging=Reel, PartNumber=105133-0001, Product=MicroUSBTypeBConnectors, Product Category=USBConnectors, RoHS=Details, Series=105133, Standard=USB, Termination Style=SolderTail
J6: "Connector", Manufacturer_Name="TE Connectivity", Mouser Part Number=571-2040910-1, Arrow Part Number=2040910-1, Arrow Price/Stock=https://www.arrow.com/en/products/2040910-1/te-connectivity, Datasheet Link=https://www.arrow.com/en/products/2040910-1/te-connectivity, Height=15mm, Manufacturer_Part_Number=2040910-1, Mouser Price/Stock=https://www.mouser.co.uk/ProductDetail/TE-Connectivity/2040910-1?qs=kAqyOuzYGe9tF8FZbDgYRA%3D%3D
J8: "Connector", Manufacturer_Name=Sullins, Arrow Part Number=SBH11-PBPC-D05-RA-BK, Datasheet Link=http://sullinscorp.com/catalogs/145_PAGE118_.100_SBH11_SERIES_MALE_BOX_HDR_ST_RA_SMT.pdf, Height=8.8mm, Manufacturer_Part_Number=SBH11-PBPC-D05-RA-BK
L3: library part CMP-2000-06702-1, "Chip Ferrite Bead, 1.5 A, -40 to 125 degC, 2-Pin SMD (0805), RoHS, Tape and Reel", Current Rating (Max)=1.5A, DC Resistance (DCR) (Max)=50mOhm, Impedance @ Frequency=40Ohm@100MHz, Manufacturer=Laird, Operating Temperature=-40°C~125°C, Package / Case=0805(2012Metric), Package Description="2-Pin Surface Mount Device, Body 2 x 1.25 mm", Ratings=-, Standard Package=1, Catalog Drawings=(HI,HZ,LI,MI)0805Series_1.10mmMax.Height, Category=Filters, Datasheet URL=http://download.siliconexpert.com/pdfs2/2015/9/8/2/39/55/778/laird_/auto/f.pdf, Datasheet Version="Rev. D, 08/2013", Family=FerriteBeadsandChips, Filter Type=PowerLine, Height (Max)="0.043\"(1.10mm)", Kits=240-2227-ND-KITEMIFERRITEBEADCHIPSMD, Manufacturer URL=https://www.lairdtech.com/, Mounting Technology=SurfaceMount, Mounting Type=SurfaceMount, Number of Lines=1, Online Catalog=MISeries, Other Names=240-2389-1, Package Reference=MI0805K400R-10, Packaging=CutTape(CT), Series=MI, Size / Dimension="0.079\"Lx0.049\"W(2.00mmx1.25mm)"
LoRa P1: "Header, 2-Pin", LatestRevisionDate=17-Jul-2002, LatestRevisionNote="Re-released for DXP Platform.", Publisher="Altium Limited"
P2: library part CMP-1755-00007-1, "Male Header, Pitch 2.5 mm, 1 x 4 Position, Height 6.1 mm, Tail Length 3.4 mm, -25 to 85 degC, RoHS, Bulk", ComponentLink1Description="Manufacturer URL", ComponentLink1URL=http://www.jst.com/home2.html, ComponentLink2Description=Datasheet, ComponentLink2URL=http://www.jst-mfg.com/product/pdf/eng/eXH.pdf, DatasheetVersion=May-16, PackageDescription="Male Header, Pitch 2.5 mm, 1 x 4 Position, Height 6.1 mm, Tail Length 3.4 mm", PackageReference=S4B-XH-A(LF)(SN)
P4: "Header, 20-Pin", LatestRevisionDate=17-Jul-2002, LatestRevisionNote="Re-released for DXP Platform.", Publisher="Altium Limited"
Q1: library part CMP-2000-04935-1, "Digital FET, N-Channel, 0.35 W, 25 V, -55 to 150 degC, 3-Pin SOT23, RoHS, Tape and Reel", Continuous Drain Current Id=220mA, Current Temperature=25degC, Drain Source Voltage Vds=25V, Manufacturer=Fairchild, On Resistance Rds(on)=5ohm, Operating Temperature Max=150degC, Operating Temperature Min=-55degC, Operating Temperature Range=-55degCto+150degC, Package / Case=SOT-23, Package Description="3-Pin Small Outline Transistor, Body 2.92 x 1.325 mm, Pitch 0.95 mm", Package Reference=SOT23-3, Package Version="Rev. 12, 03/2016", Power Dissipation Pd=350mW, Pulse Current Idm=500mA, Rds(on) Test Voltage Vgs=2.7V, Threshold Voltage Vgs Typ=850mV, Voltage Vgs Rds on Measurement=4.5V, Voltage Vgs th Max=1.5V, ComponentLink1Description=datasheety, ComponentLink1URL=https://www.onsemi.com/pub/Collateral/FDV301N-D.PDF, Current Id Max=220mA, Datasheet URL=https://datasheet.ciiva.com/8114/fdv301n-8114688.pdf, Datasheet Version=Jun-09, ESD HBM=6kV, External Depth=2.5mm, External Length / Height=1.12mm, External Width=3.05mm, Full Power Rating Temperature=25degC, Manufacturer URL=https://www.fairchildsemi.com/, No. of Pins=3, No. of Transistors=1, Package URL=http://www.fairchildsemi.com/dwg/MA/MA03D.pdf, Reel Quantity=3000, SMD Marking=301, SVHC=NoSVHC(19-Dec-2012), Tape Width=8mm, Termination Type=SMD, Transistor Case Style=SOT-23, Transistor Polarity=NChannel, Voltage Vds Typ=25V, Voltage Vgs Max=850mV
Q2: "MOSFET (P-Channel)", Manufacturer_Name=Toshiba, Mouser Part Number=757-SSM3J338RLF, Arrow Part Number=SSM3J338R,LF, Arrow Price/Stock=https://www.arrow.com/en/products/ssm3j338rlf/toshiba, Datasheet Link=http://toshiba.semicon-storage.com/info/docget.jsp?did=30384&prodName=SSM3J338R, Manufacturer_Part_Number=SSM3J338R,LF, Mouser Price/Stock=https://www.mouser.co.uk/ProductDetail/Toshiba/SSM3J338RLF?qs=lhkzy8lC%252BSvURFM9ZjmJSw%3D%3D
Q3: library part CMP-1259-00082-1, "N-Channel Trench MOSFET, 60 V, 0.36 A, -55 to 150 degC, 3-Pin SOT23, Tape and Reel", Manufacturer="NXP Semiconductors", Automotive Qualified=Y, Channel Type=N, Code_JEDEC=TO-236AB, ComponentLink1Description="Manufacturer URL", ComponentLink1URL=http://www.nxp.com/, ComponentLink2Description=Datasheet, ComponentLink2URL=http://www.nxp.com/documents/data_sheet/2N7002P.pdf, ComponentLink3Description="Package Specification", ComponentLink3URL=http://www.nxp.com/documents/outline_drawing/sot023_po.pdf, DatasheetVersion="Rev. 02", ID [max] (A)=0.36, IDM [max] (A)=1.2, Mounting Technology="Surface Mount", PackageDescription="3-Pin Small Outline Transistor Package, Body 2.9 x 1.3 mm, Pitch 0.95 mm", PackageReference=SOT23, PackageVersion="06-03-16, 03/2006", Packing="Tape & Reel", PartNumber=2N7002P,215, VDS [max] (V)=60, VGSth [typ] (V)=1.75
R2 R3 R4 R5 R9 R10 R23 R24 R25 R26 R28 R29 R30 R31: library part Res1, "Resistor", LatestRevisionDate=17-Jul-2002, LatestRevisionNote="Re-released for DXP Platform.", PackageDescription="Axial Device, Thru-Hole; 2 Leads; 0.3 in Pin Spacing", PackageReference=AXIAL-0.3, Published=8-Jun-2000, Publisher="Altium Limited"
R7 R22 R27: library part CMP-2002-07344-1, Manufacturer="Yageo / Phycomp", Part Number=RC0402FR-07100RL, spec=100
R8: library part CMP-2002-07343-1, Manufacturer="Yageo / Phycomp", Part Number=RC0402FR-07100KL, spec=100k
U1 U2: library part CMP-2000-06606-1, "iNEMO Inertial Module: 3D Accelerometer, 3D Gyroscope, 3D Magnetometer, 1.9 to 3.6 V, -40 to 85 degC, 24-Pin LGA, RoHS, Tape and Reel", Manufacturer=STMicroelectronics, Package Description="24-Pin Plastic Land Grid Array Package, Body 3.65 x 3.15 mm, Pitch 0.43 mm", Package Reference=LGA-24_3500X3000X1000, PartNumber=LSM9DS1, Sensor Case Style=LGA, Supply Voltage Max=3.6V, Supply Voltage Min=1.9V, Acceleration Range=±2g,±4g,±8g,±16g, Datasheet URL=http://www2.st.com/content/ccc/resource/technical/document/datasheet/1e/3f/2a/d6/25/eb/48/46/DM00103319.pdf/files/DM00103319.pdf/jcr:content/translations/en.DM00103319.pdf, Datasheet Version="Rev. 3, 03/2015", Gyroscope Range=±245°/s,±500°/s,±2000°/s, Manufacturer URL=http://www.st.com/, MEMS Module Function=Tri-AxisGyroscope,Tri-AxisAccelerometer,Tri-AxisMagnetometer, Mounting Technology=SurfaceMount, MSL=MSL3-168hours, No. of Pins=24Pins, Packaging=CutTape, Product Range=-, SVHC=NoSVHC(17-Dec-2015)
U3: "Undefined or Miscellaneous", Manufacturer_Name=U-Blox, Arrow Part Number=MAX-M8C-0-10, Datasheet Link=https://www.u-blox.com/sites/default/files/MAX-M8-FW3_DataSheet_%28UBX-15031506%29.pdf, Manufacturer_Part_Number=MAX-M8C-0-10
U4: library part CMP-0250-00007-1, "Quad Serial UART with 128-Word FIFO, 48-Pin TQFN, -40°C to +85°C, Pb-Free", ComponentLink1Description="Manufacturer URL", ComponentLink1URL=http://www.maxim-ic.com, ComponentLink2Description=Datasheet, ComponentLink2URL=http://datasheets.maxim-ic.com/en/ds/MAX14830.pdf, ComponentLink3Description="Package Specification", ComponentLink3URL=http://pdfserv.maxim-ic.com/package_dwgs/21-0144.PDF, DatasheetVersion="Rev 2, Sep-2011", PackageDescription="48-Pin Thin Quad Flatpack, No Leads, 7 x 7 x 0.75 mm Body, 0.5 mm Pitch, TQFN, Pb-Free", PackageReference=T4877+3, PackageVersion="revI, 2009"
U5: library part CMP-04895-000056-1, "IC OPAMP GP 1 CIRCUIT SOT23-5", Ambient Temperature Range High=+125°C, Ambient Temperature Range Low=-40°C, Input Bias Current=0.015uA, Input Offset Voltage=1.7mV, Manufacturer="Texas Instruments", Max Junction Temp=+150°C, Max Supply Voltage=5.5V, Min Supply Voltage=2.7V, Nominal Supply Current=80-130uA, Package=DBV0005A, Temperature="-40°C to +125°C", Voltage Gain=100V/mV, Automotive=No, Bandwidth=1MHz, Category=IC, ComponentLink2Description=Datasheet, ComponentLink2URL=http://www.ti.com/lit/ds/symlink/lmv321.pdf, Device Class L1="Integrated Circuits (ICs)", Device Class L2="Linear ICs", Device Class L3="Amplifiers - Op Amps", Digikey Description="IC OPAMP GP 1 CIRCUIT SOT23-5", Gain Bandwidth=1MHz, Height=1.45mm, Lead Free=Yes, Manufacturer Part Number=LMV321IDBVR, Mouser Description="Operational Amplifiers - Op Amps Low V R/R", Number of Channels=1, Octopart=https://octopart.com/lmv321idbvr-texas+instruments-410381, RoHS=TRUE, Standoff Height=0mm, Temperature Range High=+125°C, Temperature Range Low=-40°C
X1: library part CMP-0277-00002-1, "Low Profile Surface Mount Microprocessor Crystal, 4.096 MHz +/-30 ppm, 180 Ohm, -40 to 85 degC, 2-Pin 11.4 x 4.7 x 3.3 mm SMD, RoHS, Tape and Reel", Freq. Stability="+/- 30 ppm", Frequency="4.096 MHz", Load Capacitance="18 pF", Manufacturer=Abracon, Operating Temp. Range="-40 to 85 degC", PartNumber=ABLS2-4.096MHZ-D4Y-T, Shunt Capacitance="7 pF Max.", ComponentLink1Description="Manufacturer URL", ComponentLink1URL=http://www.abracon.com/, ComponentLink2Description=Datasheet, ComponentLink2URL=http://www.abracon.com/Resonators/ABLS2.pdf, DatasheetVersion="Rev. 03.31.11", Esr="180 Ohm", Freq. Tolerance="+/- 30 ppm", Mounting Technology="Surface Mount", Operation Mode="Fundamental or 3rd Overtone", PackageDescription="2-Pin SMD, Body 11.4 x 4.7 mm, Height 3.3 mm", PackageReference=ABLS2-2, Packing="Tape and Reel", RoHS=TRUE

## Free pads (board coordinates)
  round 118.11 hole 118.11: 11(250,250) 11(250,2750) 11(2750,250) 11(2750,2750) 11(3600,250) 11(3600,2750)

## Via types
v1: diameter 20, hole 15, Top Layer to Bottom Layer, 104 vias
v2: diameter 19.68, hole 7.87, Top Layer to Bottom Layer, 25 vias

## Nets (pads, with @x,y where several pads share a name; then routed paths per layer and width w, separated by ;. In a path a pad name is that pad's centre, name@x,y a point inside that pad or via, vN(x,y) a via of type N, cw(c..) or ccw(c..) an arc to the next point about the centre after c; other vN are vias at no path point)
1.8V: C40.2 C55.2 C56.1 C57.1 C58.1 C59.1 IC11.7 J6.183 J6.184 J6.185 J6.186 R31.2 | length 2134.7
  Top Layer w10: IC11.7@2836.61,1922.8 2905,1922.8 ; R31.2@2875.31,1410 2875.31,1694.69 2845,1725 2845,1795.86 2885,1835.86 2885,1902.8 2905,1922.8 ; C55.2@2941.89,2585 2941.89,2515.79 C56.1@2942.68,2515 ; C40.2@2942.68,1925 C56.1@2942.68,2515 ; C40.2@2943.98,1921.33 C40.2@2940.31,1925 2938.11,1922.8 2905,1922.8 ; J6.183@3085.08,2554.21 2964.21,2554.21 2945,2535 2945,2517.32 C56.1@2942.68,2515 ; v1(3190,2550) 3187.29,2550 3182.29,2555 3109.29,2555 3110.08,2555.79 J6.185@3110.08,2577.83 3272.17,2577.83 3285,2565 3368.9,2565 J6.186@3369.92,2566.02 ; C57.1@3457.68,2525 3457.09,2525 3449.88,2532.2 3449.88,2532.8 3440.28,2542.4 J6.184@3369.92,2542.4 J6.186@3369.92,2566.02 ; C58.1@3457.68,2575 3457.09,2575 3448.11,2566.02 J6.186@3369.92,2566.02
  Bottom Layer w10: v1(3190,2550) 3223.86,2550 3235,2538.86 C59.1@3235,2525
3.3_COMMS_EN: IC10.2 J6.59
3.3_GPS_EN: IC8.2 J6.57